# Altium PCB EJ1-PCB.PcbDoc
Units mm, origin at the board's own origin, x right, y up, seen from the top; angles counter-clockwise.
Board outline 100 x 100 mm, 2 copper layers (Top Layer, Bottom Layer), stack 1.626 mm thick; 59 components, 45 nets, 211 pads, 22 vias.
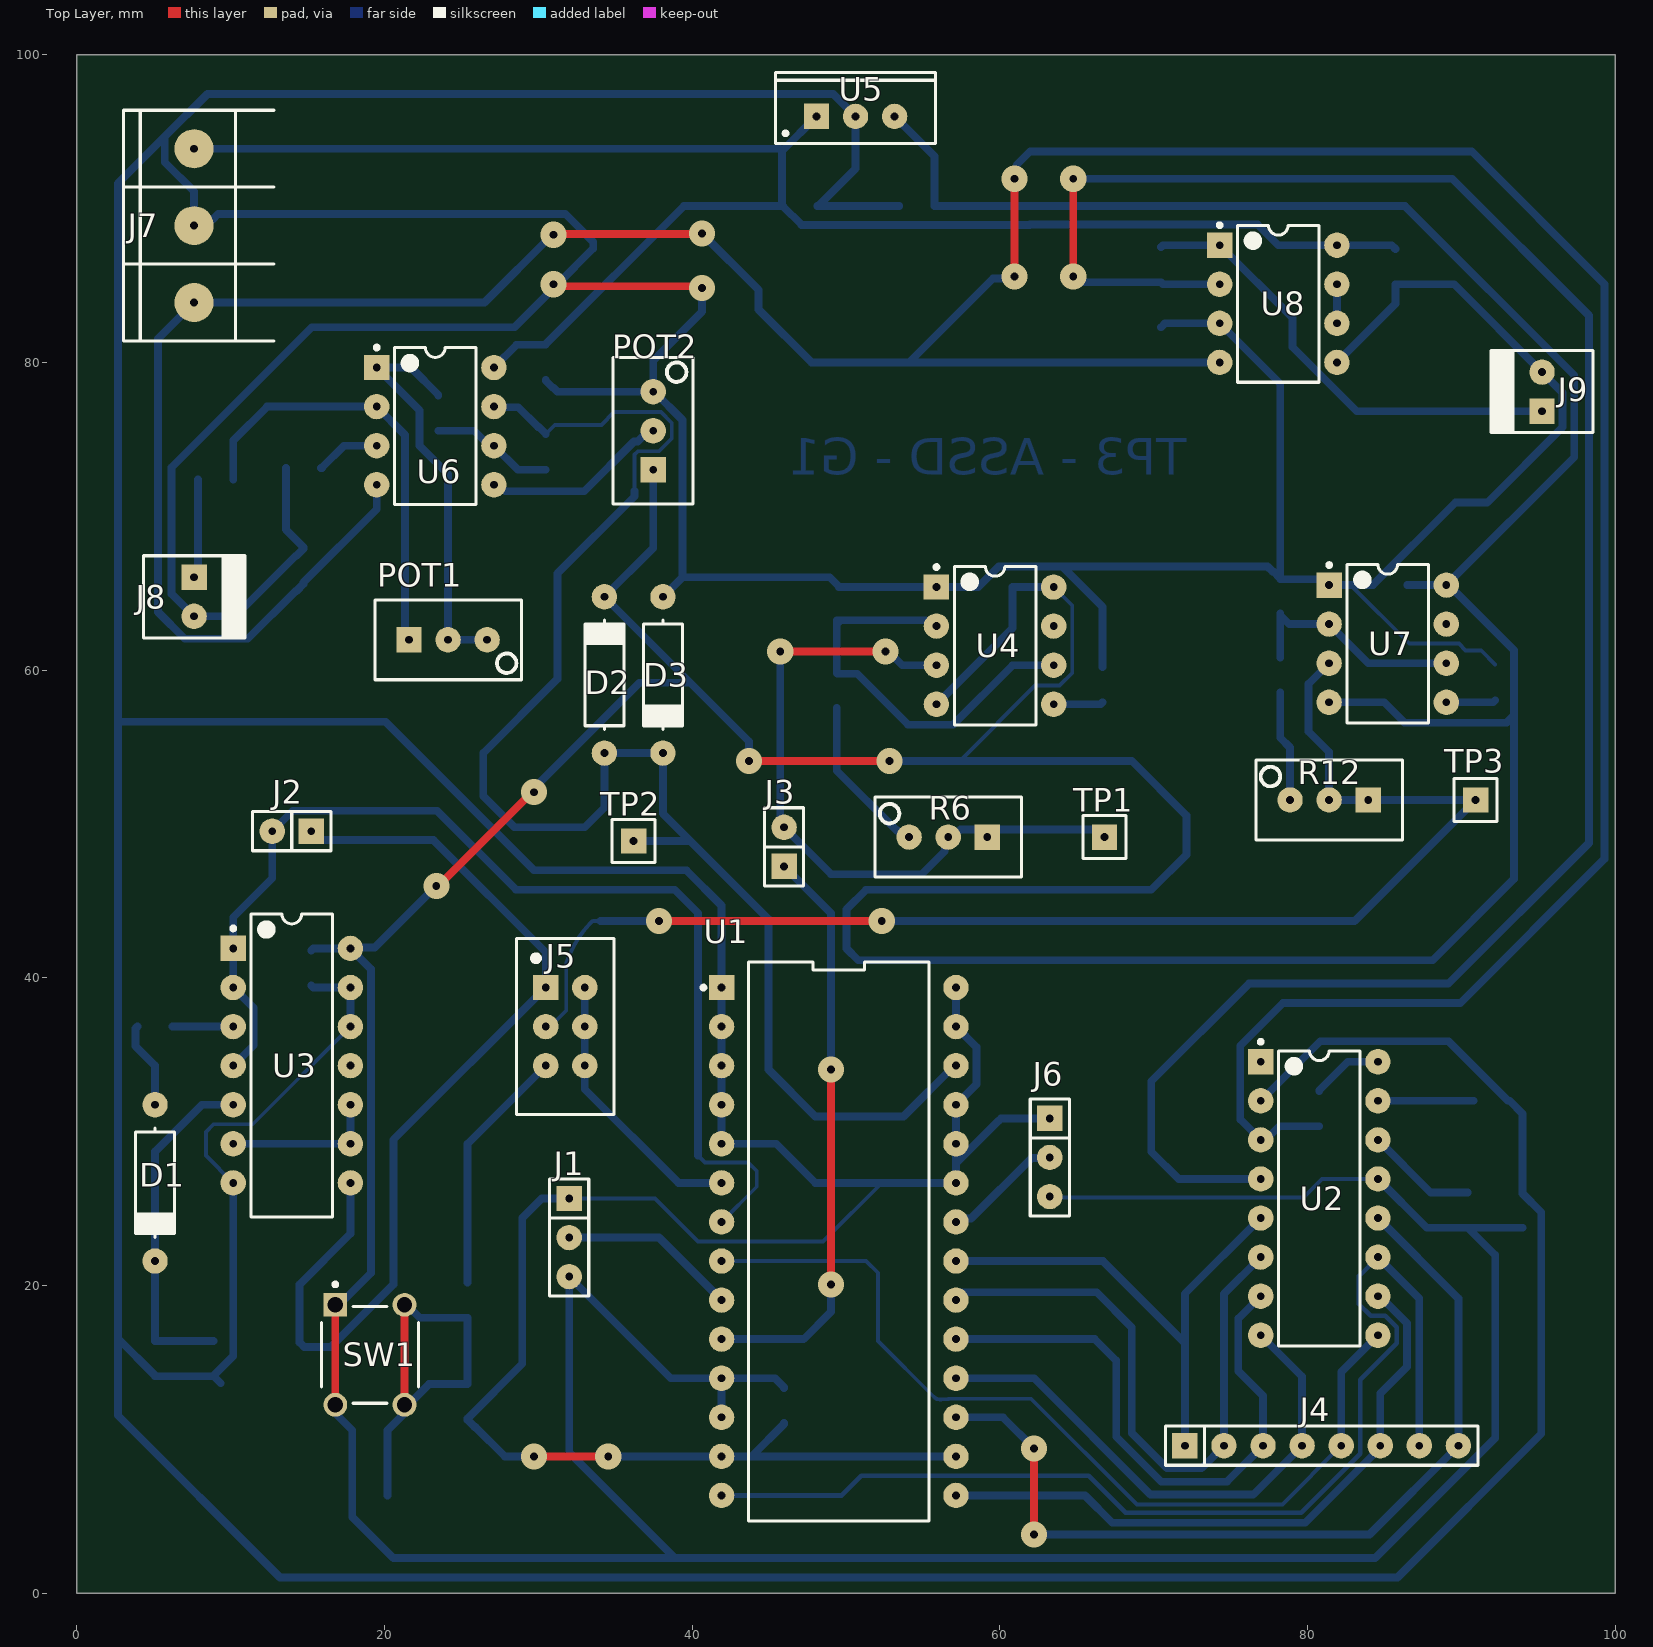
[diagram p0: Top Layer view]
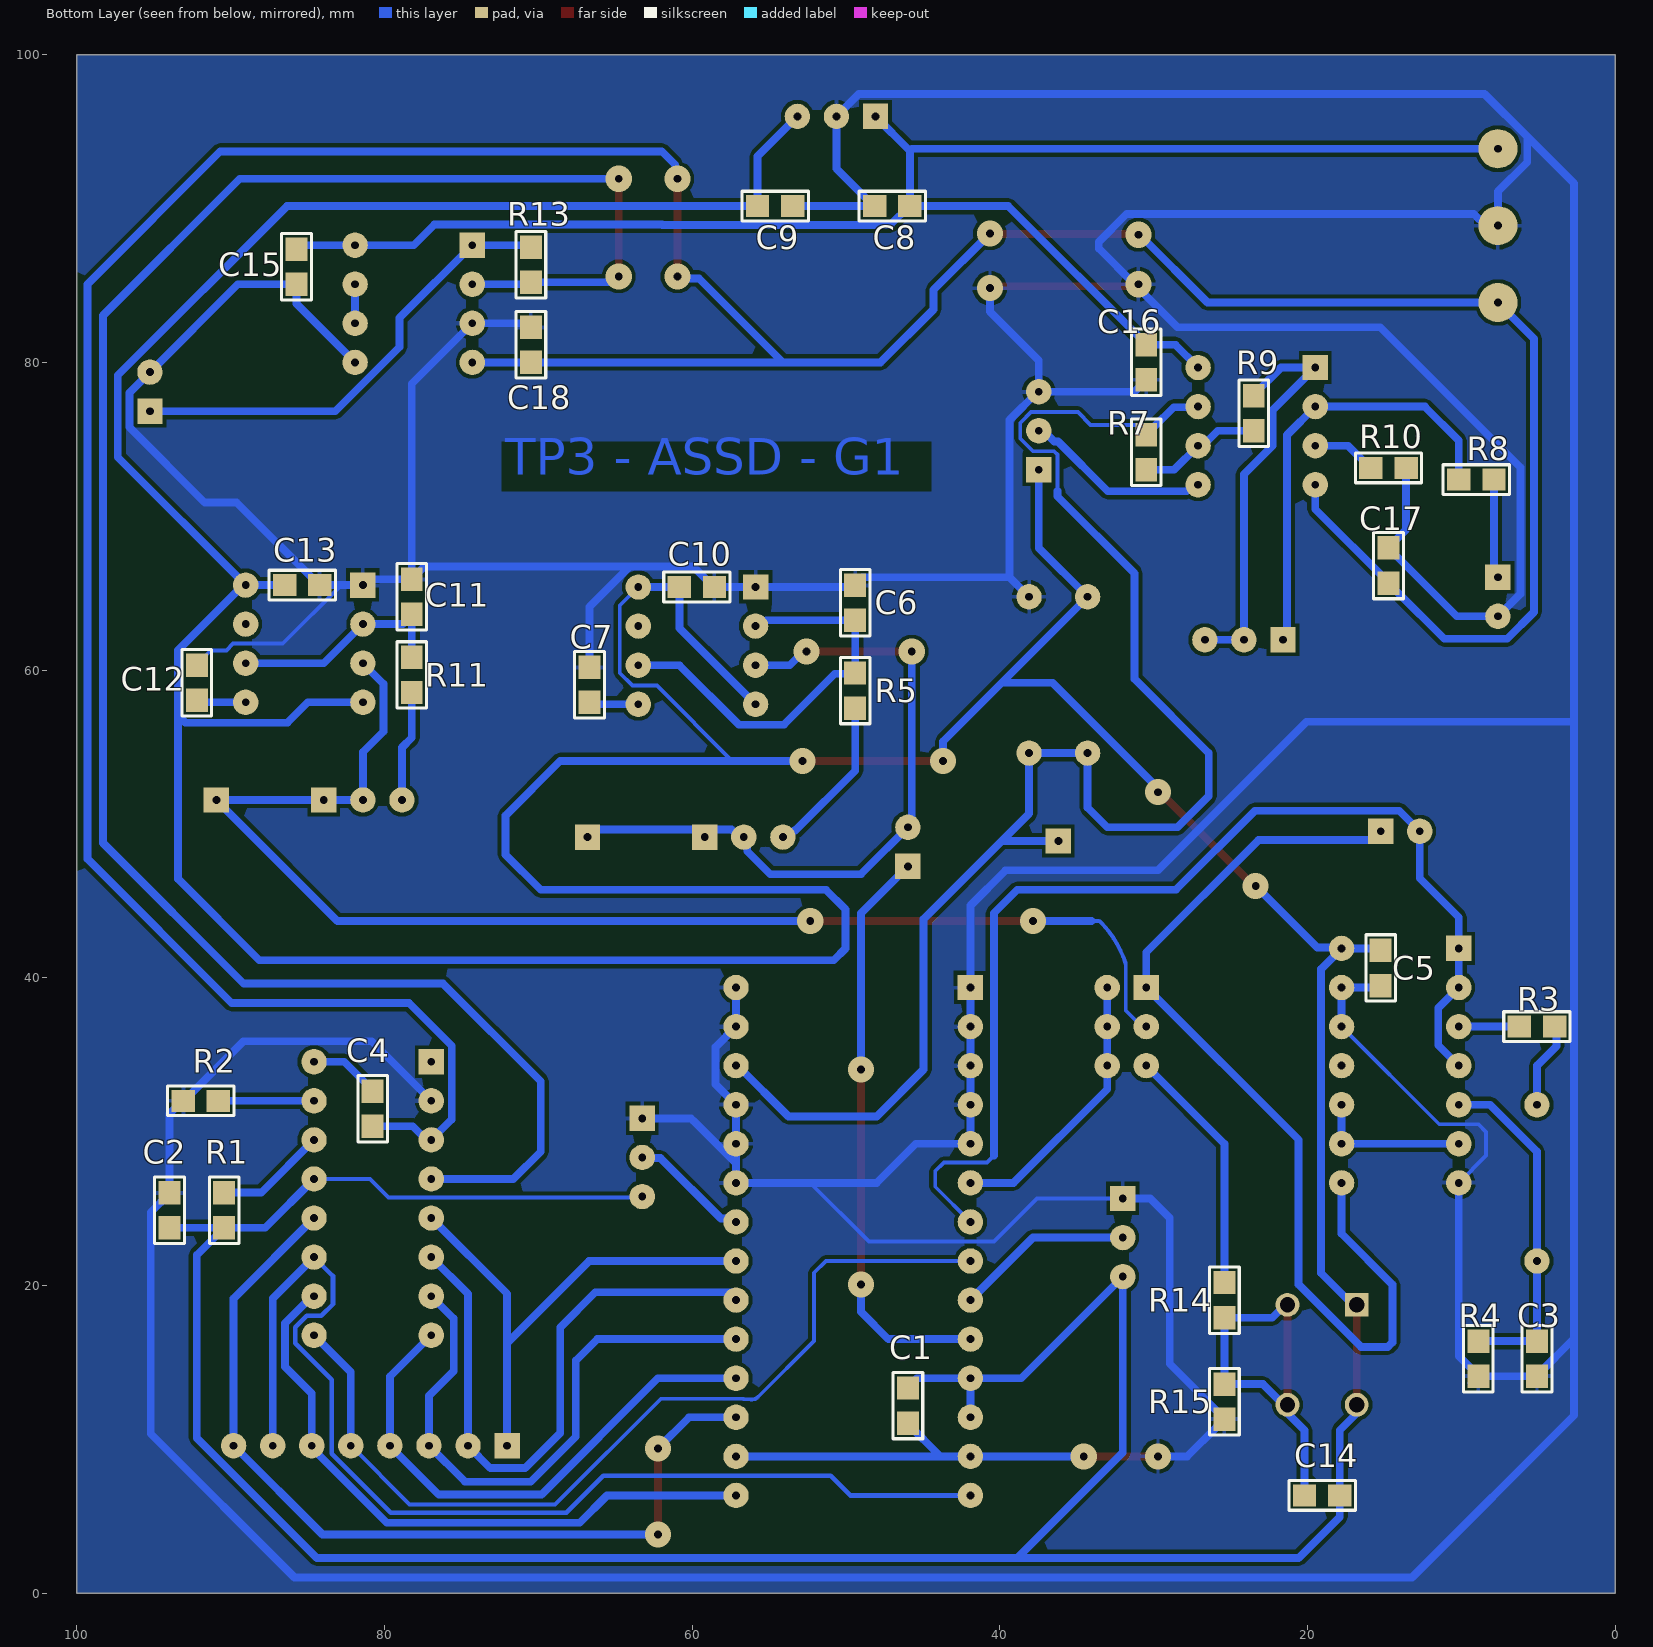
[diagram p1: Bottom Layer view, seen from below]

## Layer stack, top to bottom
Top Solder: solder mask 0.0102, Solder Resist, Dk 3.5
Top Layer: signal copper 0.0508
Dielectric 1: dielectric 1.524, FR-4, Dk 4.8
Bottom Layer: signal copper 0.0508
Bottom Solder: solder mask 0.0102, Solder Resist, Dk 3.5

## Board outline
0,0 100,0 100,100 0,100

## Design rules (kind name [scope] priority, off if disabled: settings)
Clearance [All] p1: gap=0.254 ignorepadtopadclearanceinfootprint=TRUE
PlaneClearance [All] p1: clearance=0.635
PolygonConnect [All] p1: connectstyle=Relief reliefconductorwidth=0.254 reliefentries=4 polygonreliefangle="90 Angle" airgapwidth=0.254
RoutingVias [All] p1: holewidth=0.508 width=1.702 viastyle="Through Hole" minholewidth=0.508 minwidth=1.702 maxholewidth=0.508 maxwidth=1.702
SilkToSilkClearance [All] p1: silktosilkclearance=0
SilkToSolderMaskClearance [IsPad] p1: minsilkscreentomaskgap=0 clearancetoexposedcopper=TRUE
SolderMaskExpansion [All] p1: expansion=0.102 istentingtop=FALSE
Width [All] p1: maxlimit=1.016 minlimit=0.254 preferedwidth=0.508 minimp=50.000000 maximp=50.000000 favimp=50.000000
27 further rules are at their usual default settings.

## Components (designator, comment, footprint, x,y, rotation, side; value= is the part's Value field where it differs from the comment)
C1 "470n" 0805 45.974,12.192 r90 bottom
C2 "470n" 0805 93.98,24.892 r90 bottom
C3 "10nF" 0805 5.08,15.24 r270 bottom
C4 "0.1uF" 0805 80.772,31.496 r90 bottom
C5 "470n" 0805 15.24,40.64 r270 bottom
C6 "220pF" 0805 49.403,64.389 r90 bottom
C7 "100nF" 0805 66.675,59.055 r90 bottom
C8 "330n" 0805 46.99,90.17 r0 bottom
C9 "100n" 0805 54.61,90.17 r180 bottom
C10 "470n" 0805 59.69,65.405 r180 bottom
C11 "1.8nF" 0805 78.232,64.77 r90 bottom
C12 "100nF" 0805 92.202,59.182 r90 bottom
C13 "470n" 0805 85.344,65.532 r180 bottom
C14 "100nF" 0805 19.05,6.35 r180 bottom
C15 "470n" 0805 85.725,86.233 r270 bottom
C16 "470n" 0805 30.48,80.01 r270 bottom
C17 "470n" 0805 14.732,66.802 r270 bottom
C18 "470n" 0805 70.485,81.153 r270 bottom
D1 "1N4148" DO41 5.08,26.67 r270 top
D2 "1N5819" DO41 34.29,59.69 r90 top
D3 "1N5819" DO41 38.1,59.69 r270 top
J1 "JUMPER" JUMPER3 32.004,23.114 r270 top
J2 "JUMPER" JUMPER2 13.97,49.53 r180 top
J3 "JUMPER" JUMPER2 45.974,48.514 r90 top
J4 "CON8" SIP8 72.032,9.584 r0 top
J5 "CON3*2" SIP3*2 30.48,39.37 r270 top
J6 "JUMPER" JUMPER3 63.246,28.321 r270 top
J7 "Source" BORNERA3 7.62,88.9 r0 top
J8 "Vin" MOLEX2 7.62,66.04 r270 top
J9 "Vout" MOLEX2 95.25,76.835 r90 top
POT1 "100K" "PRESET V" 24.13,61.976 r0 top
POT2 "100K" "PRESET V" 37.465,75.565 r90 top
R1 "2.7K" 0805 90.424,24.892 r270 bottom
R2 "2.7K" 0805 91.948,32.004 r180 bottom
R3 "220" 0805 5.08,36.83 r180 bottom
R4 "100K" 0805 8.89,15.24 r90 bottom
R5 "1K" 0805 49.403,58.674 r270 bottom
R6 "100K" "PRESET V" 56.642,49.149 r180 top
R7 "22K" 0805 30.48,74.168 r90 bottom
R8 "47K" 0805 9.017,72.39 r0 bottom
R9 "22K" 0805 23.495,76.708 r270 bottom
R10 "22K" 0805 14.732,73.152 r180 bottom
R11 "1K" 0805 78.232,59.69 r270 bottom
R12 "100K" "PRESET V" 81.407,51.562 r180 top
R13 "2.7K" 0805 70.485,86.36 r90 bottom
R14 "1K" 0805 25.4,19.05 r270 bottom
R15 "1K" 0805 25.4,12.446 r90 bottom
SW1 "EVQ-PAG05R" FP-EVQ-PAG05R-MFG 19.05,15.494 r0 top
TP1 "TP" TPTH 66.802,49.149 r180 top
TP2 "TP" TPTH 36.195,48.895 r0 top
TP3 "TP" TPTH 90.932,51.562 r0 top
U1 "ADC0808CCN" FP-N0028A-MFG 49.53,22.86 r0 top
U2 "DAC0808LCN" NFG0016A 80.772,25.654 r0 top
U3 "SN74HC132N" N0014A 13.97,34.29 r0 top
U4 "LM555CN" N08E 59.69,61.595 r0 top
U5 "L7805CV" TO220 50.62,96 r0 top
U6 "TL082CP" P0008A 23.3,75.865 r0 top
U7 "LM555CN" N08E 85.217,61.722 r0 top
U8 "TL082CP" P0008A 78.105,83.82 r0 top

## Footprints (in the part's own frame and the unit in brackets; to place one, negate y for a bottom-side part, rotate by r counter-clockwise, add the part's x,y. Pads: shape width x height; smd on the part's side, far side on the other; paste and mask are expansions set on the pad)
0805 [mil] "Pasivo 0805"
  rect 60x56 smd: 1(-45,0) 2(45,0)
  silkscreen extent -85,-38 85,38, body extent -40,-25 39,25, height 15
BORNERA3 [mil] "Bornera con Tornillos 5mm separación"
  round 100 hole 20: 1(0,196.85) 2(0,0) 3(0,-196.85)
  silkscreen extent -181,-295 205,295, body extent -148,-291 155,319, height 395
DO41 [mil]
  round 65 hole 20: 1(-200,0) 2(200,0)
  silkscreen extent -140,-50 140,50, body extent -215,-47 215,54, height 80
FP-EVQ-PAG05R-MFG [mm]
  rect 1.55x1.55 hole 1 paste-1000 mask+0: A(-2.25,3.25)
  round 1.55 hole 1 paste-1000 mask+0: A'(-2.25,-3.25) B(2.25,3.25) B'(2.25,-3.25)
  silkscreen extent -3.15,-3.15 3.15,4.7, body extent -3.25,-4.13 3.25,4.13, height 0.25
FP-N0028A-MFG [mil]
  rect 65x65 hole 20 paste-39370.1 mask+0: 1(-300,650)
  round 65 hole 20 paste-39370.1 mask+0: 2(-300,550) 3(-300,450) 4(-300,350) 5(-300,250) 6(-300,150) 7(-300,50) 8(-300,-50) 9(-300,-150) 10(-300,-250) 11(-300,-350) 12(-300,-450) 13(-300,-550) 14(-300,-650) 15(300,-650) 16(300,-550) 17(300,-450) 18(300,-350) 19(300,-250) 20(300,-150) 21(300,-50) 22(300,50) 23(300,150) 24(300,250) 25(300,350) 26(300,450) 27(300,550) 28(300,650)
  silkscreen extent -351,-715 231,715, body extent -329,-729 329,729, height 10
JUMPER2 [mil]
  rect 65x65 hole 20: 1(-50,0)
  round 65 hole 20: 2(50,0)
  silkscreen extent -100,-50 100,50, body extent -97,-50 100,50, height 374
JUMPER3 [mil]
  rect 65x65 hole 20: 1(-100,0)
  round 65 hole 20: 2(0,0) 3(100,0)
  silkscreen extent -150,-50 150,50, body extent -150,-51 150,50, height 636
MOLEX2 [mil]
  rect 65x65 hole 20: 1(0,0)
  round 65 hole 20: 2(100,0)
  silkscreen extent -55,-130 155,130, body extent -50,-125 150,125, height 423
N08E [mil] "DIP, 8-Pin, Row Spacing 7.62 mm, Pitch 2.54 mm"
  rect 65x65 hole 20: 1(-150,150)
  round 65 hole 20: 2(-150,50) 3(-150,-50) 4(-150,-150) 5(150,-150) 6(150,-50) 7(150,50) 8(150,150)
  silkscreen extent -155,-203 104,206, body extent -142,-203 142,203, height 210
N0014A [mil] "DIP, 14-Leads, Body 19.7x6.6mm, Pitch 2.54mm"
  rect 65x65 hole 20: 1(-150,300)
  round 65 hole 20: 2(-150,200) 3(-150,100) 4(-150,0) 5(-150,-100) 6(-150,-200) 7(-150,-300) 8(150,-300) 9(150,-200) 10(150,-100) 11(150,0) 12(150,100) 13(150,200) 14(150,300)
  silkscreen extent -155,-388 104,388, body extent -155,-388 155,388, height 200
NFG0016A [mil] "DIP, 16-Leads, Body 19.2x6.6mm, Pitch 2.54mm"
  rect 65x65 hole 20: 1(-150,350)
  round 65 hole 20: 2(-150,250) 3(-150,150) 4(-150,50) 5(-150,-50) 6(-150,-150) 7(-150,-250) 8(-150,-350) 9(150,-350) 10(150,-250) 11(150,-150) 12(150,-50) 13(150,50) 14(150,150) 15(150,250) 16(150,350)
  silkscreen extent -155,-378 104,406, body extent -167,-375 167,375, height 161
P0008A [mil] "DIP, 8-Leads, Body 10.15x6.6mm, Pitch 2.54mm"
  rect 65x65 hole 20: 1(-150,150)
  round 65 hole 20: 2(-150,50) 3(-150,-50) 4(-150,-150) 5(150,-150) 6(150,-50) 7(150,50) 8(150,150)
  silkscreen extent -155,-201 104,206, body extent -155,-200 155,200, height 200
"PRESET V" [mil]
  rect 65x65 hole 20: 1(-100,0)
  round 65 hole 20: 2(0,0) 3(100,0)
  silkscreen extent -188,-102 188,102, body extent -185,-95 190,95, height 455
SIP3*2 [mil]
  rect 65x65 hole 20: 1(0,0)
  round 65 hole 20: 2(0,100) 3(100,0) 4(100,100) 5(200,0) 6(200,100)
  silkscreen extent -125,-75 325,175, body extent -50,-51 250,149, height 398
SIP8 [mil]
  rect 65x65 hole 20: 1(0,0)
  round 65 hole 20: 2(100,0) 3(200,0) 4(300,0) 5(400,0) 6(500,0) 7(600,0) 8(700,0)
  silkscreen extent -50,-50 750,50, body extent -50,-50 750,50, height 330
TO220 [mil] "TO, Thru-Hole, Vertical, Heatsink Mounted; 3 In-Line Leads; Pitch 2.54 mm"
  rect 65x65 hole 20: 1(-100,0)
  round 65 hole 20: 2(0,0) 3(100,0)
  silkscreen extent -205,-69 205,112, body extent -207,-71 207,114, height 776
TPTH [mil]
  rect 65x65 hole 20: 1(0,0)
  silkscreen extent -55,-55 55,55, body extent -50,-50 50,50, height 238

## Part data
C1 C2 C3 C4 C5 C6 C7 C8 C9 C10 C11 C12 C13 C14 C15 C16 C17 C18: library part CAP
D1: library part DIODO
D2 D3: library part "DIODO SCHOTTKY"
J1 J6: library part JUMPER3
J2: "Just in case HC132 does not work"
J7: library part "BORNERA 3"
J8 J9: library part MOLEX2
POT1 POT2 R6 R12: library part PRESET
R1 R2 R3 R4 R5 R7 R8 R9 R10 R11 R13 R14 R15: library part RES
SW1: library part CMP-05618-000039-1, "SWITCH TACTILE SPST-NO 0.02A 15V", Actuator Color=Red, Contact Current Rating=20mA, Contact Resistance=50mR, Max Operating Temperature=70°C, Max Voltage Rating (DC)=15V, Min Operating Temperature=-20°C, Operating Force=2.6N, Package Quantity=500, Actuator Length=1.6mm, Actuator Type=Standard, Contact Plating=Silver, Current Rating=20mA, Depth=6.5mm, Electrical Life=50000Cycles, Height=5mm, Illumination Type=Non-Illuminated, Lead Free="Lead Free", Length=6mm, Max Current Rating=20mA, Mechanical Life=50000Cycles, Mount="Through Hole", Orientation=Straight, Packaging=Bulk, Radiation Hardening=No, REACH SVHC="No SVHC", RoHS Compliant=Yes, Series=EVQPA, Size=6mm, Switch Function=Off-Mom, Switch Travel=0.25mm, Termination="PC Pin", Throw Configuration=SPST, Voltage Rating (DC)=15V, Width=6mm
U1: library part CMP-0054-00026-4, "IC ADC 8BIT MPU 8CH MUX 28-DIP", Case/Package=DIP, Max Operating Temperature=85°C, Max Power Dissipation=875mW, Max Supply Voltage=6V, Min Operating Temperature=-40°C, Min Supply Voltage=4.5V, Nominal Supply Current=300uA, Operating Supply Voltage=5V, Package Quantity=13, Power Consumption=1.5mW, Conversion Rate=10KS/s, Converter Type="GENERAL PURPOSE", Height=3.81mm, Input Type=SINGLE-ENDED, Interface=Parallel, Lead Free="Contains Lead", Length=36.83mm, Mount="Through Hole", Number of A/D Converters=1, Number of Analog Inputs=8, Number of Bits=8, Number of Channels=8, Number of Converters=1, Number of Elements=1, Number of Inputs=8, Number of Pins=28, Packaging=Rail/Tube, Polarity=Unipolar, Power Dissipation=875mW, Radiation Hardening=No, REACH SVHC="No SVHC", Resolution=8b, Sampling Rate=10KS/s, Supply Type=Single, Width=13.72mm
U2: library part CMP-0061-00001-3, "8-Bit D/A Converter, 16-pin MDIP", Manufacturer="Texas Instruments", PackageTopMarking=NSUZXYYTTE#*DAC0808LCN*MC1408P8, PowerWise=N, Code_JEDEC=MS-001-BB, ComponentLink1Description="Datasheet URL", ComponentLink1URL=http://www.ti.com/general/docs/lit/getliterature.tsp?genericPartNumber=DAC0808&fileType=pdf, CompType="D/A Converter", PackageDescription="MDIP, .750 x .250 x .130in, 16 Lead, .100in Pitch", PackageReference=NFG0016A, PinCount=16, RoHS=N
U3: library part CMP-1627-00473-3, "Quadruple Positive-NAND Gates With Schmitt-Trigger Inputs, N0014A, TUBE", F @ Nom Voltage(Max)(Mhz)=70, Generic Part Number=SN74HC132, ICC @ Nom Voltage(Max)(mA)=0.02, Manufacturer="Texas Instruments", Operating Temperature Range(C)="-40 to 85", Rating=Catalog, tpd @ Nom Voltage(Max)(ns)=31, Voltage(Nom)(V)=5, Bits(#)=4, Code_JEDEC=MS-001, DatasheetVersion=SCLS034F, Input Type=CMOS, Output Drive (IOL/IOH)(Max)(mA)=5.2/-5.2, Output Type=CMOS, PackageReference=N0014A, Schmitt Trigger=Yes, Technology Family=HC, VCC(Max)(V)=6, VCC(Min)(V)=2
U4 U7: library part CMP-0056-00017-2, "Timer, 8-pin MDIP", Manufacturer="National Semiconductor", PackageTopMarking=NSUZXYTTE#*LM*555CN, PowerWise=N, Code_JEDEC=MS-001-BA, ComponentLink1Description="LM555 Datasheet", ComponentLink1URL=http://www.national.com/ds/LM/LM555.pdf, ComponentLink2Description="LM555 Web Page", ComponentLink2URL=http://www.national.com/pf/LM/LM555.html, ComponentLink3Description="N08E Package Page", ComponentLink3URL=http://www.national.com/packaging/folders/n08e.html, CompType="Analog IC", DatasheetVersion=Jul-2006, PackageDescription="MDIP, .365 x .250 x .130in, 8 Lead, .100in Pitch", PackageReference=N08E, PackageVersion="revG, May-2006", PinCount=8, RevisionNote="Component URLs added", RoHS=N
U5: library part CMP-0244-00483-1, "Positive Voltage Regulator, 5V, 3-Pin TO-220", ComponentLink1Description="Manufacturer URL", ComponentLink1URL=http://www.st.com, ComponentLink2Description=Datasheet, ComponentLink2URL=http://www.st.com/internet/com/TECHNICAL_RESOURCES/TECHNICAL_LITERATURE/DATASHEET/CD00000444.pdf, ComponentLink3Description="Package Specification", ComponentLink3URL=http://www.st.com/internet/com/TECHNICAL_RESOURCES/TECHNICAL_LITERATURE/PACKAGE_INFORMATION/CD00004649.pdf, DatasheetVersion=16/11/2011, PackageDescription="TO, Thru-Hole, Vertical, Heatsink Mounted; 3 In-Line Leads; Pitch 2.54 mm", PackageReference=TO220, PackageVersion=ver3.0
U6 U8: library part CMP-0055-00158-5, "JFET-Input Operational Amplifier, 7 to 36 V, 0 to 70 degC, 8-pin DIP (P8), Pb-Free (RoHS)", Manufacturer="Texas Instruments", Rating=Catalog, Total Supply Voltage(Max)(+5V is 5, +/-5V is 10)=36, Total Supply Voltage(Min)(+5V is 5, +/-5V is 10)=7, CMRR(Min)(dB)=70, Code_JEDEC=MS-001, ComponentLink1Description="Manufacturer URL", ComponentLink1URL=http://www.ti.com/, ComponentLink2Description=Datasheet, ComponentLink2URL=http://www.ti.com/lit/ds/symlink/tl082.pdf, ComponentLink3Description="Package Specification", ComponentLink3URL=http://www.ti.com/litv/pdf/mpdi001b, DatasheetVersion=SLOS081G, Eco-Plan="Pb-Free (RoHS)", GBW(Typ)(MHz)=3, IIB(Max)(pA)=400, Iq per channel(Max)(mA)=2.8, Mounting Technology="Through Hole", Number of Channels=2, Offset Drift(Typ)(uV/C)=18, PackageDescription="8-Pin Plastic In-Line, Body 9.59 x 6.35 mm, Pitch 2.54 mm", PackageReference=P0008A, PackageVersion="4040082/E, 04/2010", PartNumber=TL082CP, Slew Rate(Typ)(V/us)=13, Sub Family="General Purpose Amplifier, High Supply Voltage Amplifier (>=30V)", Vio (25C)(Max)(mV)=15, Vn at 1kHz(Typ)(nV/rtHz)=18

## Via types
v1: diameter 1.702, hole 0.508, Top Layer to Bottom Layer, 22 vias

## Nets (pads, with @x,y where several pads share a name; then routed paths per layer and width w, separated by ;. In a path a pad name is that pad's centre, name@x,y a point inside that pad or via, vN(x,y) a via of type N, cw(c..) or ccw(c..) an arc to the next point about the centre after c; other vN are vias at no path point)
+5V: C1.2 C2.1 C5.1 C9.1 C10.1 C13.1 C14.2 D2.2 J1.3 J6.3 POT2.1 R1.2 SW1.A SW1.A' U1.11 U1.12 U2.13 U3.14 U4.4 U4.8 U5.3 U7.4 U7.8 | length 500.4
  Top Layer w0.508: SW1.A' SW1.A ; v1(23.368,45.974) 23.495,45.974 29.591,52.07 v1(29.718,52.07) ; v1(43.688,54.102) v1(52.832,54.102)
  Bottom Layer w0.254: 57.404,54.102 62.298,58.996 63.877,58.996 64.706,59.825 64.706,64.198 U4.8 ; J6.3@63.246,25.527 63.436,25.717 79.73,25.717 80.936,26.924 U2.13
  Bottom Layer w0.508: C5.1 15.367,41.91 U3.14 ; SW1.A'@16.8,11.99 16.8,11.69 17.907,10.583 17.907,4.953 20.574,2.286 38.862,2.286 ; SW1.A@16.8,18.49 19.113,20.804 19.113,40.576 U3.14 ; v1(23.368,45.974) 19.367,41.974 17.843,41.974 U3.14 ; v1(29.718,52.07) 29.718,52.324 36.576,59.182 39.878,59.182 ; POT2.1 37.465,67.945 D2.2 39.878,59.182 ; U1.12 U1.11 ; v1(43.688,54.102) 43.688,55.372 39.878,59.182 ; C1.2 45.974,13.386 45.39,13.97 U1.11 ; v1(52.832,54.102) 57.404,54.102 68.58,54.102 72.136,50.546 72.136,48.006 69.85,45.72 51.308,45.72 50.038,44.45 50.038,41.91 50.8,41.148 88.138,41.148 93.421,46.431 93.421,57.067 ; U5.3 55.753,93.407 C9.1 86.341,90.17 97.346,79.165 97.346,73.85 U7.8 ; U4.4 60.833,62.738 C10.1 U4.8 ; U7.4 84.981,57.912 86.315,56.578 92.933,56.578 93.421,57.067 ; U2.13 87.757,23.749 R1.2 ; C13.1 U7.8 ; C2.1 R1.2 ; 38.862,2.286 32.004,9.144 J1.3 38.608,13.97 U1.11 ; 38.862,2.286 84.4,2.286 92.202,10.088 92.202,21.971 R1.2 ; U7.8 89.187,65.532 93.421,61.297 93.421,57.067
+Vcc: C8.1 C15.1 C16.1 J7.1 U5.1 U6.8 U8.8 | length 109.2
  Bottom Layer w0.508: J7.1 45.714,93.9 45.847,93.767 ; U6.8 28.588,81.153 C16.1 30.48,81.204 39.446,90.17 C8.1 ; U5.1 45.847,93.767 ; C15.1 85.471,87.63 U8.8 78.099,87.63 76.766,88.963 61.948,88.963 61.935,88.951 47.117,88.951 45.898,90.17 C8.1 ; C8.1 45.847,93.767
-Vcc: C4.1 C17.2 C18.2 J7.3 U2.3 U6.4 U8.4 | length 249.5
  Top Layer w0.508: v1(30.988,88.303) 31.032,88.348 40.273,88.348 40.317,88.392 v1(40.64,88.392) ; v1(60.96,85.598) v1(60.96,91.948)
  Bottom Layer w0.508: U6.4 19.49,70.467 14.732,65.71 C17.2 14.732,65.608 14.275,65.151 14.224,65.151 11.112,62.039 7.015,62.039 5.271,63.784 5.271,81.55 J7.3 26.496,83.9 30.899,88.303 v1(30.988,88.303) ; v1(40.64,88.392) 44.31,84.722 44.31,83.452 47.752,80.01 54.102,80.01 ; v1(60.96,85.598) 60.833,85.471 59.563,85.471 54.102,80.01 ; v1(60.96,91.948) 61.106,92.094 61.106,92.856 61.976,93.726 90.678,93.726 99.314,85.09 99.314,47.734 89.934,38.354 78.403,38.354 75.629,35.58 75.629,30.797 U2.3 77.271,29.464 78.16,30.353 C4.1 ; U8.4 C18.2 54.102,80.01
Clock1: J3.2 R6.1 R6.2 TP1.1 U4.3 | length 46.4
  Top Layer w0.508: v1(45.72,61.214) v1(52.578,61.214)
  Bottom Layer w0.508: v1(45.72,61.214) 45.72,50.038 49.031,46.727 54.928,46.727 56.423,48.223 56.423,48.93 R6.2 56.951,49.149 57.451,49.648 58.683,49.648 R6.1 59.681,49.648 66.303,49.648 TP1.1 ; v1(52.578,61.214) 52.776,61.214 53.665,60.325 U4.3
Clock2: J5.3 R12.1 R12.2 TP3.1 U7.3 | length 88.3
  Top Layer w0.508: v1(37.846,43.688) v1(52.324,43.688)
  Bottom Layer w0.254: J5.3@30.775,36.83 31.813,37.869 31.813,40.887 cw(c32.067,40.886) 31.827,40.967 cw(c38.709,38.612) 33.423,43.609 cw(c33.607,43.434) 33.607,43.688 34.036,43.688
  Bottom Layer w0.508: J5.3 J5.3@30.775,36.83 ; 34.036,43.688 v1(37.846,43.688) ; v1(52.324,43.688) 83.058,43.688 TP3.1 R12.1 R12.2 81.407,54.673 80.073,56.007 80.073,59.118 U7.3
DACout: R13.1 U2.4 U8.2 | length 134.5
  Top Layer w0.508: v1(64.77,85.598) v1(64.77,91.948)
  Bottom Layer w0.508: v1(64.77,91.948) 89.408,91.948 98.298,83.058 98.298,48.768 89.154,39.624 76.2,39.624 69.85,33.274 69.85,28.702 71.628,26.924 U2.4 ; v1@65.024,85.344 65.151,85.217 R13.1 70.612,85.09 U8.2
EOC: J2.2 U1.7 U3.1 U3.2 U3.4 | length 72.6
  Bottom Layer w0.254: 40.386,28.448 40.831,28.003 43.624,28.003 44.196,27.432 44.196,26.416 U1.7
  Bottom Layer w0.508: U3.4 11.493,35.623 11.493,38.036 U3.2 U3.1 10.16,43.942 12.7,46.482 J2.2 14.034,50.863 23.412,50.863 28.556,45.72 38.862,45.72 40.386,44.196 40.386,28.448
GND: C1.1 C2.2 C3.2 C5.2 C6.2 C7.2 C8.2 C9.2 C10.2 C11.2 C12.2 C13.2 C15.2 C16.2 C17.1 C18.1 D3.1 J1.1 J6.1 J7.2 J8.2 J9.2 POT2.3 R2.1 R4.1 R10.2 R15.1 U1.1 U1.2 U1.3 U1.4 U1.5 U1.13 U1.16 U1.23 U1.24 U1.25 U1.27 U1.28 U2.2 U3.7 U3.12 U3.13 U4.1 U5.2 U7.1 U8.3 U8.5 | length 761.3
  Top Layer w0.508: v1(29.718,8.89) v1(34.544,8.89) ; v1(30.988,85.09) 31.115,84.963 40.513,84.963 v1(40.64,84.836)
  Bottom Layer w0.254: U3.7 8.382,28.448 8.382,29.972 8.89,30.48 11.43,30.48 U3.12 ; J1.1 37.592,25.654 40.386,22.86 48.514,22.86 52.324,26.67 ; 82.804,65.532 86.614,61.722 89.84,61.722 90.284,61.277 91.3,61.277 C12.2@92.202,60.376
  Bottom Layer w0.508: R4.1@9.347,13.64 R4.1 ; U3.7 10.16,15.418 8.89,14.148 R4.1 ; R10.2 13.589,69.139 14.732,67.996 C17.1 14.732,67.894 14.275,67.437 14.224,67.437 10.287,63.5 J8.2 7.611,63.5 6.159,64.951 6.159,73.182 15.273,82.296 28.448,82.296 30.988,84.836 v1(30.988,85.09) 31.242,85.09 33.572,87.42 33.572,87.84 31.75,89.662 9.188,89.662 8.814,89.289 8.009,89.289 J7.2 7.62,89.154 7.62,91.117 5.715,93.022 5.715,94.689 ; C5.2 15.367,39.37 U3.13 U3.12 ; v1(29.718,8.89) 27.813,8.89 25.908,10.795 25.857,10.795 25.4,11.252 R15.1 25.4,11.354 28.956,14.91 28.956,24.384 30.226,25.654 J1.1 ; C16.2 30.48,78.816 30.937,78.359 30.988,78.359 31.242,78.105 POT2.3 ; v1(34.544,8.89) U1.13 43.866,8.89 ; D3.1 39.116,65.786 39.37,66.04 ; v1(40.64,84.836) 40.64,83.312 37.465,80.137 POT2.3 ; C1.1 45.974,10.998 43.866,8.89 ; C8.2 C8.2@48.184,90.17 ; C9.2 C8.2@48.184,90.17 ; U1.16 43.866,8.89 ; U1.28 U1.27 58.483,35.496 58.483,33.084 U1.25 U1.24 57.15,27.94 ; 59.944,30.734 57.15,27.94 ; 60.071,30.861 J6.1 ; C7.2 66.675,64.116 64.052,66.739 ; C18.1 70.739,82.55 U8.3 78.232,78.613 C11.2 ; U2.2 80.835,35.877 89.167,35.877 93.04,32.004 R2.1 93.142,32.004 93.98,31.166 C2.2 93.98,25.984 95.199,24.765 95.199,10.363 85.852,1.016 13.208,1.016 2.667,11.557 2.667,16.561 ; U8.5 85.725,83.82 C15.2 89.535,85.09 J9.2 96.584,78.041 96.584,75.799 91.679,70.894 89.614,70.894 84.252,65.532 C13.2 82.804,65.532 U7.1 81.026,65.913 C11.2 ; 2.667,16.561 2.667,56.642 ; 2.667,16.561 5.08,14.148 C3.2 R4.1 ; 2.667,56.642 20.066,56.642 29.718,46.99 39.624,46.99 41.91,44.704 U1.1 U1.2 U1.3 U1.4 U1.5 45.466,29.21 48.006,26.67 52.324,26.67 U1.23 57.15,27.94 ; 2.667,56.642 2.667,91.641 5.715,94.689 ; 5.715,94.689 8.486,97.461 49.169,97.461 50.62,96.009 U5.2 50.62,92.606 C8.2@48.184,90.17 ; POT2.3 37.529,78.105 39.37,76.264 39.37,66.04 ; 39.37,66.04 48.946,66.04 49.53,65.456 49.53,65.405 U4.1 C10.2 58.598,65.405 59.931,66.739 64.052,66.739 ; 64.052,66.739 77.406,66.739 77.724,66.421 77.775,66.421 78.232,65.964 C11.2
IN0: D2.1 D3.2 R7.2 TP2.1 U1.26 U6.7 | length 101.7
  Bottom Layer w0.254: R7.2 30.48,75.362 31.064,75.946 34.102,75.946 34.927,76.772 37.965,76.772 38.672,76.065 38.672,75.065 37.838,74.231 36.482,74.231 36.258,74.008 36.258,71.643
  Bottom Layer w0.508: U6.7 27.151,77.094 28.697,77.094 29.972,75.819 30.023,75.819 R7.2@30.48,75.362 ; TP2.1 39.751,48.895 ; 36.258,71.643 36.258,71.31 31.242,66.294 31.242,59.436 26.416,54.61 26.416,51.816 28.448,49.784 33.02,49.784 34.29,51.054 D2.1 D3.2 38.1,50.673 39.814,48.959 44.958,43.815 44.958,34.036 48.006,30.988 53.741,30.988 57.043,34.29 U1.26
NetC3_1: C3.1 D1.2 R4.2 U3.5 | length 22.5
  Bottom Layer w0.508: R4.2 C3.1 D1.2 5.08,28.702 8.128,31.75 U3.5
NetC4_2: C4.2 U2.16 | length 4.6
  Bottom Layer w0.508: C4.2 80.772,32.69 82.626,34.544 U2.16
NetC6_1: C6.1 R5.1 U4.2 U4.6 | length 27.3
  Bottom Layer w0.508: C6.1@49.53,63.119 C6.1 ; U4.2 55.571,62.865 55.19,63.246 C6.1 ; U4.6 60.833,60.325 56.959,56.451 54.038,56.451 50.724,59.766 49.454,59.766 R5.1 49.403,62.865 C6.1
NetC7_1: C7.1 U4.5 | length 3.2
  Bottom Layer w0.508: U4.5 66.548,57.785 C7.1
NetC11_1: C11.1 R11.1 U7.2 U7.6 | length 14.9
  Bottom Layer w0.508: R11.1 C11.1@78.232,63.576 ; C11.1@78.232,63.678 C11.1 C11.1@78.232,63.576 ; U7.6 83.947,60.452 U7.2 78.816,62.992 C11.1@78.232,63.576
NetC12_1: C12.1 U7.5 | length 3.2
  Bottom Layer w0.508: U7.5 92.075,57.912 C12.1
NetC14_1: C14.1 R14.2 R15.2 SW1.B SW1.B' | length 26
  Top Layer w0.508: SW1.B' SW1.B
  Bottom Layer w0.508: C14.1 20.193,10.583 21.3,11.69 21.3,11.99 22.899,13.589 R15.2 R14.2 22.295,17.907 21.712,18.49 SW1.B@21.3,18.49
NetD1_1: D1.1 R3.2 | length 5.7
  Bottom Layer w0.508: R3.2 3.81,36.703 3.81,35.56 5.08,34.29 D1.1
NetJ1_2: J1.2 U1.9 | length 11.6
  Bottom Layer w0.508: J1.2 37.846,23.114 U1.9
NetJ2_1: J2.1 J5.1 U3.8 | length 63.8
  Bottom Layer w0.508: J2.1 15.811,48.959 23.177,48.959 30.48,41.656 J5.1 20.574,29.464 20.574,20.066 16.51,16.002 14.776,16.002 14.478,16.3 14.478,20.06 17.78,23.362 U3.8
NetJ3_1: J3.1 U1.10 | length 38.1
  Top Layer w0.508: v1(49.022,20.066) v1(49.022,34.036)
  Bottom Layer w0.508: U1.10 47.244,16.51 49.022,18.288 v1(49.022,20.066) ; J3.1 49.022,44.196 v1(49.022,34.036)
NetJ4_1: J4.1 U1.21 U2.5 | length 33.9
  Bottom Layer w0.508: U1.21 66.698,21.59 72.032,16.256 ; J4.1 72.032,16.256 ; U2.5 72.032,19.454 72.032,16.256
NetJ4_2: J4.2 U1.20 U2.6 | length 39.8
  Bottom Layer w0.508: U1.20@57.404,19.558 66.294,19.558 68.58,17.272 68.58,10.414 70.871,8.123 73.121,8.123 74.572,9.575 J4.2 74.572,19.454 U2.6
NetJ4_3: J4.3 U1.19 U2.7 | length 38.7
  Bottom Layer w0.508: U1.19 66.167,16.51 67.564,15.113 67.564,10.16 70.49,7.234 74.762,7.234 J4.3 77.112,12.826 75.501,14.436 75.501,17.843 U2.7
NetJ4_4: J4.4 U1.18 U2.8 | length 35.3
  Bottom Layer w0.508: U1.18 62.23,13.97 69.799,6.401 76.469,6.401 J4.4 79.652,14.074 U2.8
NetJ4_5: J4.5 U1.8 U2.9 | length 59.2
  Bottom Layer w0.254: U1.8 49.784,21.59 51.308,21.59 52.07,20.828 52.07,16.399 55.705,12.764 ccw(c56.126,13.182) 56.183,12.591 cw(c57.15,2.262) 57.15,12.636 62.04,12.636 68.91,5.766 78.374,5.766 J4.5
  Bottom Layer w0.508: J4.5 82.192,14.374 U2.9
NetJ4_6: J4.6 U1.15 U2.10 | length 41.8
  Bottom Layer w0.508: U1.15 65.532,6.35 67.31,4.572 79.856,4.572 84.732,9.448 84.732,12.976 86.474,14.718 86.474,17.548 84.718,19.304 U2.10
NetJ4_7: J4.7 U1.14 U2.11 | length 73.8
  Bottom Layer w0.305: U1.14 49.712,6.35 50.982,7.62 65.786,7.62 68.174,5.232 79.583,5.232 83.424,9.074 83.424,13.864 85.814,16.254 85.814,17.274 85.054,18.034 84.11,18.034 83.35,18.794 83.35,20.612 U2.11
  Bottom Layer w0.508: U2.11 87.272,19.154 J4.7
NetJ4_8: J4.8 U1.17 U2.12 | length 58.4
  Top Layer w0.508: v1(62.23,3.81) v1(62.23,9.398)
  Bottom Layer w0.508: U1.17 60.198,11.43 v1(62.23,9.398) ; v1(62.23,3.81) 67.569,3.81 84.038,3.81 J4.8 89.812,19.154 U2.12
NetJ5_2: J5.2 J5.4 J5.6 U1.6 | length 18
  Bottom Layer w0.508: J5.2 J5.4 J5.6 33.02,32.766 39.116,26.67 U1.6
NetJ6_2: J6.2 U1.22 | length 7.8
  Bottom Layer w0.508: U1.22 57.369,24.349 58.131,24.349 62.06,28.278 63.203,28.278 J6.2
NetPOT1_1: POT1.1 R8.2 U6.2 | length 28.8
  Bottom Layer w0.508: R8.2 10.16,74.93 12.365,77.135 U6.2 21.336,75.289 21.336,62.23 POT1.1
NetPOT1_2: POT1.2 POT1.3 R9.1 U6.1 | length 27
  Bottom Layer w0.508: R9.1 23.495,77.902 21.722,79.675 U6.1 22.276,76.889 22.276,74.593 24.13,72.738 POT1.2 POT1.3
NetPOT2_2: POT2.2 U6.5 | length 12.2
  Bottom Layer w0.508: U6.5 27.419,72.055 27.846,71.628 32.98,71.628 36.219,74.867 36.457,74.867 37.156,75.565 POT2.2
NetR1_1: R1.1 U2.14 | length 7.3
  Bottom Layer w0.508: U2.14 88.011,26.035 R1.1
NetR2_2: R2.2 U2.15 | length 6.2
  Bottom Layer w0.508: U2.15 R2.2
NetR3_1: R3.1 U3.3 | length 3.9
  Bottom Layer w0.508: R3.1 U3.3
NetR5_2: R5.2 R6.3 | length 10.6
  Bottom Layer w0.508: R5.2 49.403,53.467 53.297,49.573 53.369,49.573 53.793,49.149 R6.3
NetR7_1: R7.1 R9.2 U6.6 | length 8
  Bottom Layer w0.508: R9.2 25.835,75.565 26.805,74.595 U6.6 28.68,73.025 R7.1
NetR10_1: R10.1 U6.3 | length 4.2
  Bottom Layer w0.508: R10.1 15.926,73.152 17.369,74.595 U6.3
NetR11_2: R11.2 R12.3 | length 7.2
  Bottom Layer w0.508: R11.2 78.232,55.611 78.867,54.976 R12.3
NetU3_6: U3.6 U3.9 U3.10 | length 10.2
  Bottom Layer w0.508: U3.6 U3.9 U3.10
NetU8_6: U8.6 U8.7 | length 2.5
  Bottom Layer w0.508: U8.6 U8.7
SW: J5.5 R14.1 | length 16.2
  Bottom Layer w0.508: R14.1 25.4,29.21 J5.5
Vin: J8.1 R8.1 | length 6.5
  Bottom Layer w0.508: J8.1 7.874,66.294 R8.1
Vout: J9.1 R13.2 U8.1 | length 30.4
  Bottom Layer w0.508: R13.2 70.612,87.63 U8.1 79.035,82.89 79.035,81.004 83.204,76.835 J9.1
pads on no net: U2.1 U3.11 U4.7 U7.7

## Polygon pours and split planes (outlines as drawn)
GND on Bottom Layer "GND_L02_P000" (solid, remove dead copper, pour order 0): 0,0 100,0 100,100 0,100

## Other copper
Bottom Layer:
  text "TP3 - ASSD - G1" at 72.136,71.931 h4.06

## Dimensions
100,100 to 0,100 on Top Overlay
100,100 to 105,0 on Top Overlay